# Altium PCB BMS.PcbDoc
Units mm, origin at the board's own origin, x right, y up, seen from the top; angles counter-clockwise.
Board outline 35.19 x 35.25 mm, 2 copper layers (Top Layer, Bottom Layer), stack 1.78 mm thick; 25 components, 16 nets, 75 pads, 0 vias.
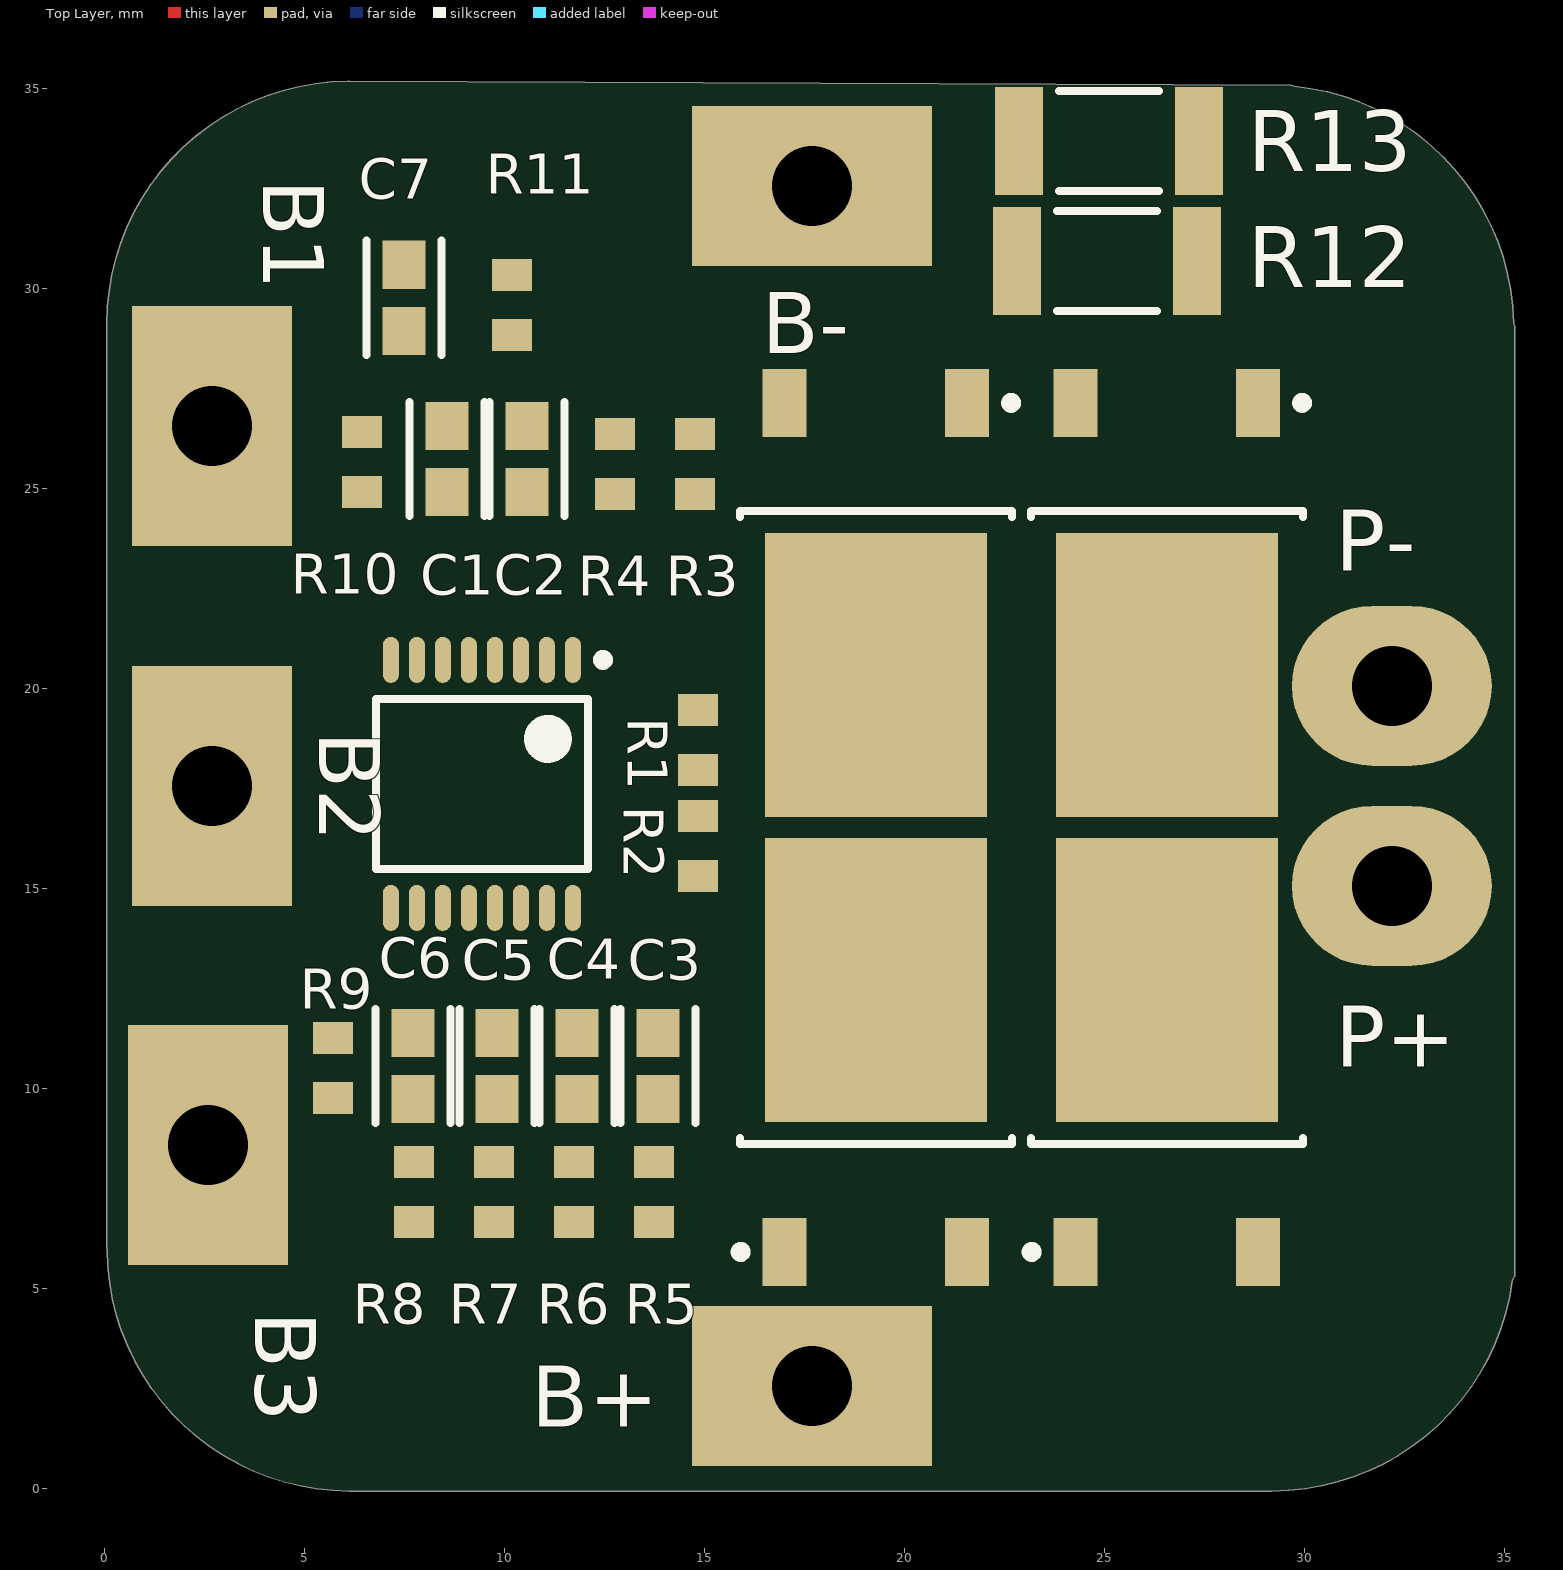
[diagram p0: Top Layer view]
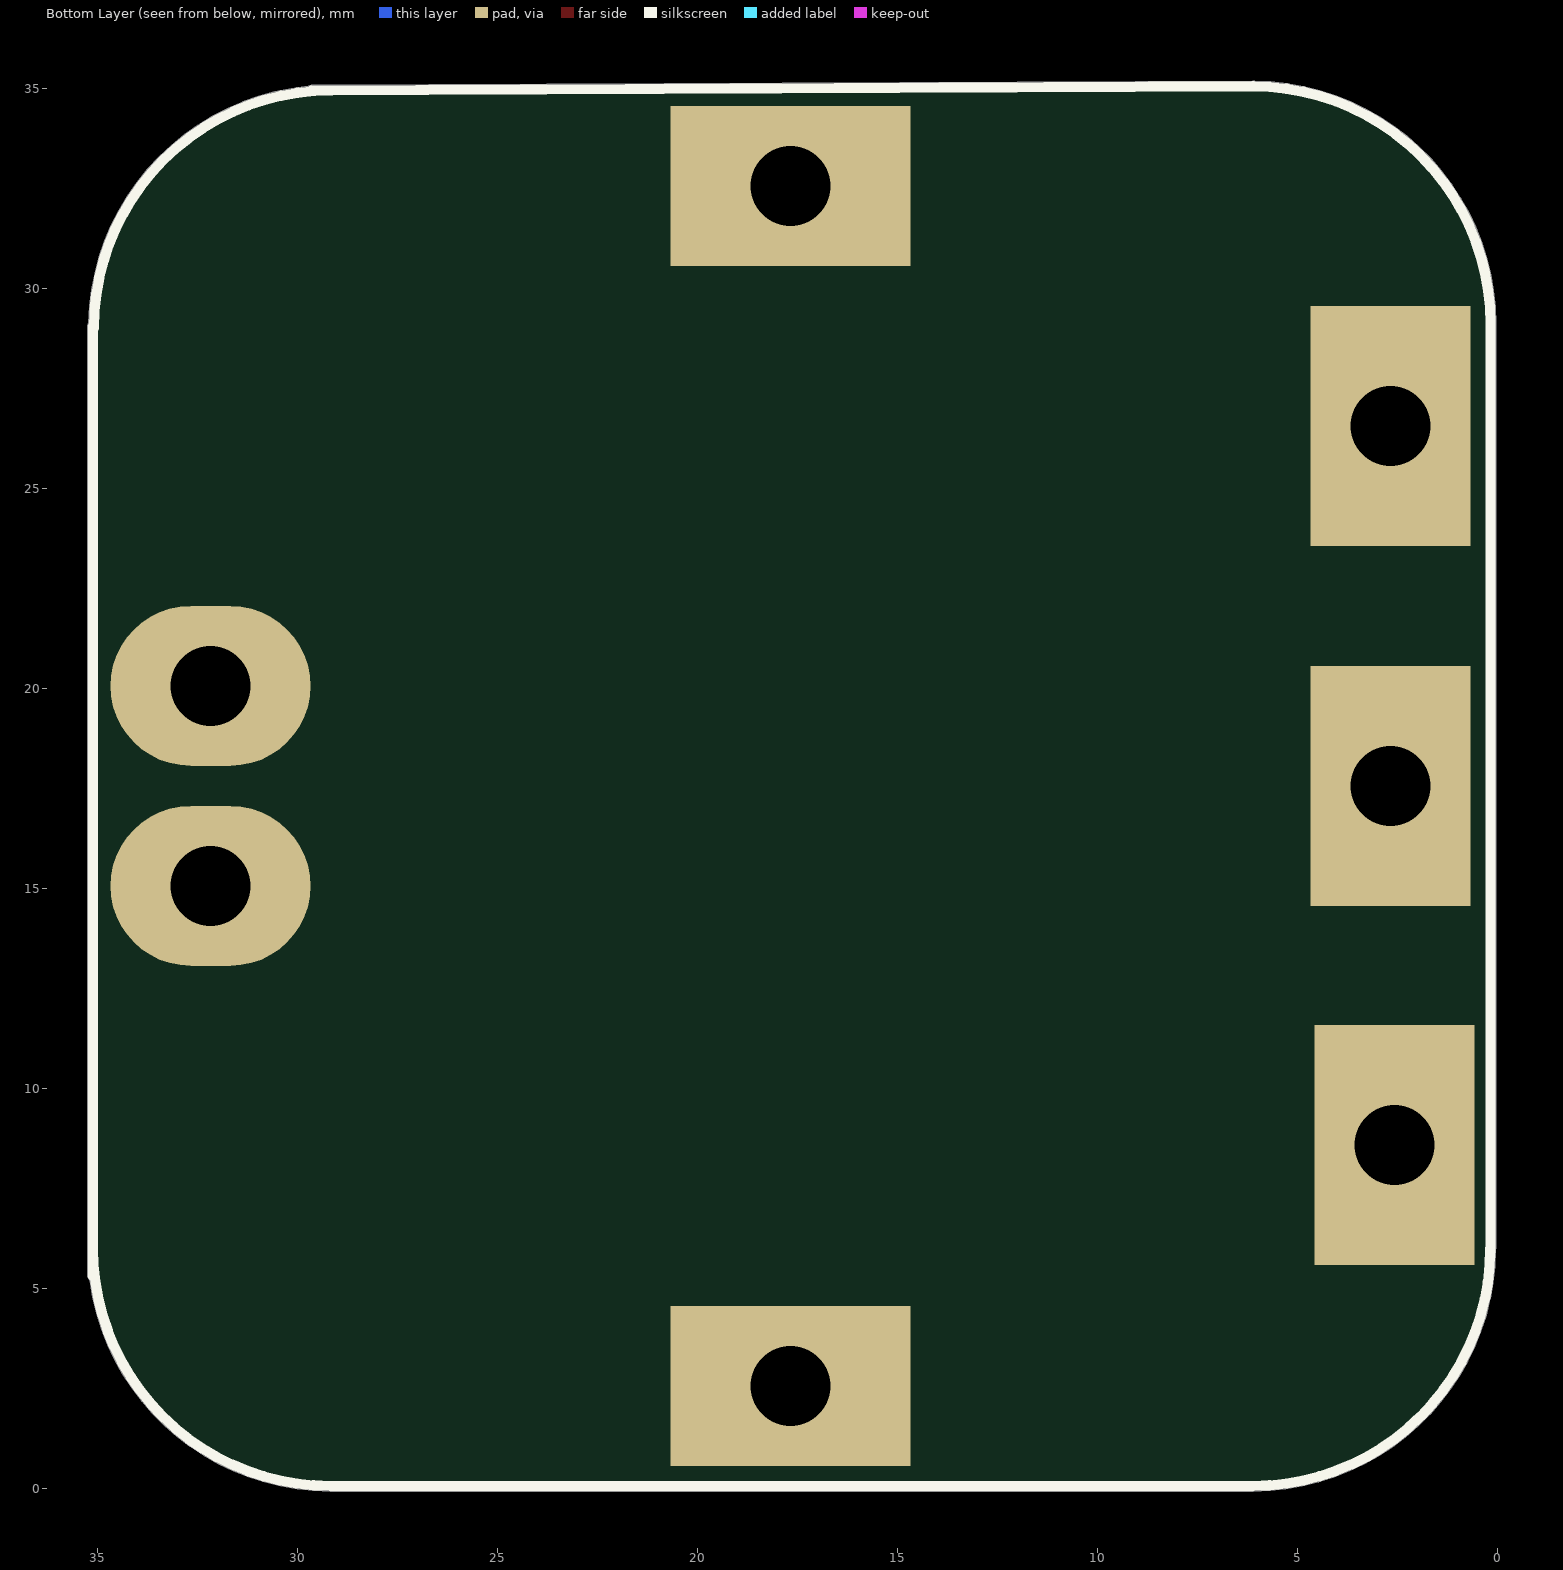
[diagram p1: Bottom Layer view, seen from below]

## Layer stack, top to bottom
Top Solder: solder mask 0.0102, Solder Resist, Dk 3.5
Top Layer: signal copper 0.0356
Dielectric 1: dielectric 1.7086, FR-4, Dk 4.8
Bottom Layer: signal copper 0.0356
Bottom Solder: solder mask 0.0102, Solder Resist, Dk 3.5

## Board outline
0.048,6.02 0.048,29.075 0.048,29.125 cw(c6.113,29.125) 6.077,35.19 6.114,35.196 29.654,35.091 29.733,35.063 cw(c29.153,29.025) 35.218,29.146 35.24,29.075 35.24,5.312 35.187,5.209 cw(c29.175,6.013) 29.175,-0.052 6.12,-0.052 6.112,-0.052 cw(c6.12,6.013)

## Design rules (kind name [scope] priority, off if disabled: settings)
Clearance [All] p1: gap=0.254 ignorepadtopadclearanceinfootprint=FALSE except(0: Arc-Hole Track-Hole SMDPad-Hole THPad-Hole Via-Hole Fill-Hole Poly-Hole Region-Hole Text-Hole)
PolygonConnect [All] p1: connectstyle=Relief reliefconductorwidth=0.254 reliefentries=4 polygonreliefangle="90 Angle" airgapwidth=0.254
RoutingVias [All] p1: holewidth=0.711 width=1.27 viastyle="Through Hole" minholewidth=0.711 minwidth=1.27 maxholewidth=0.711 maxwidth=1.27
SolderMaskExpansion [All] p1: expansion=0.102 istentingtop=FALSE
Width [All] p1: maxlimit=0.254 minlimit=0.254 preferedwidth=0.254
30 further rules are at their usual default settings.

## Components (designator, comment, footprint, x,y, rotation, side; value= is the part's Value field where it differs from the comment)
* "AOD403" AOD403 26.55,22.4 r270 top
* "AOD403" AOD403 19.275,22.4 r270 top
* "AOD403" AOD403 26.55,10.675 r90 top
* "AOD403" AOD403 19.275,10.675 r90 top
* "8254A" 8254A 9.425,17.625 r270 top
C1 "Comment" FP-0603-L_1_6_0_15-W_0_81-IPC_A 8.55,25.75 r90 top
C2 "Comment" FP-0603-L_1_6_0_15-W_0_81-IPC_A 10.55,25.75 r90 top
C3 "Comment" FP-0603-L_1_6_0_15-W_0_81-IPC_A 13.825,10.575 r90 top
C4 "Comment" FP-0603-L_1_6_0_15-W_0_81-IPC_A 11.8,10.575 r90 top
C5 "Comment" FP-0603-L_1_6_0_15-W_0_81-IPC_A 9.8,10.575 r90 top
C6 "Comment" FP-0603-L_1_6_0_15-W_0_81-IPC_A 7.7,10.575 r90 top
C7 "Comment" FP-0603-L_1_6_0_15-W_0_81-IPC_A 7.475,29.776 r90 top
R1 "Comment" RESC1608X55X25ML10T15#1 14.825,18.725 r90 top
R2 "Comment" RESC1608X55X25ML10T15#2 14.825,16.075 r90 top
R3 "Comment" RESC1608X55X25ML10T15#2 14.75,25.625 r90 top
R4 "Comment" RESC1608X55X25ML10T15#2 12.75,25.625 r90 top
R5 "Comment" RESC1608X55X25ML10T15#2 13.725,7.425 r90 top
R6 "Comment" RESC1608X55X25ML10T15#2 11.725,7.425 r90 top
R7 "Comment" RESC1608X55X25ML10T15#2 9.725,7.425 r90 top
R8 "Comment" RESC1608X55X25ML10T15#2 7.725,7.425 r90 top
R9 "Comment" RESC1608X55X25ML10T15#2 5.7,10.525 r90 top
R10 "Comment" RESC1608X55X25ML10T15#2 6.425,25.675 r90 top
R11 "Comment" RESC1608X55X25ML10T15#2 10.175,29.6 r90 top
R12 "Comment" RESC5125X89X51LL25T25 25.05,30.7 r0 top
R13 "Comment" RESC5125X89X51LL25T25 25.1,33.7 r0 top

## Footprints (in the part's own frame and the unit in brackets; to place one, negate y for a bottom-side part, rotate by r counter-clockwise, add the part's x,y. Pads: shape width x height; smd on the part's side, far side on the other; paste and mask are expansions set on the pad)
8254A [mm] "TSOP, 16-Leads, Body 5,10x4,40mm, Pitch 0,65mm, IPC Medium Density"
  oval 1.15x0.4 smd: 1(-3.1,2.275) 2(-3.1,1.625) 3(-3.1,0.975) 4(-3.1,0.325) 5(-3.1,-0.325) 6(-3.1,-0.975) 7(-3.1,-1.625) 8(-3.1,-2.275) 9(3.1,-2.275) 10(3.1,-1.625) 11(3.1,-0.975) 12(3.1,-0.325) 13(3.1,0.325) 14(3.1,0.975) 15(3.1,1.625) 16(3.1,2.275)
  silkscreen extent -3.22,-2.65 2.13,3.15, body extent -3.25,-2.65 3.25,2.65, height 1.1
AOD403 [mm] "D-PAK, 3-Pads, Body 6,21x6,74mm (max), IPC Medium Density"
  rect 1.7x1.1 smd: 1(-4.75,2.28) 3(-4.75,-2.28)
  rect 7.1x5.55 smd: 4(2.05,0)
  silkscreen extent -4.87,-3.4 -1.9,3.51, body extent -5.54,-3.3 4.49,3.3, height 2.41
FP-0603-L_1_6_0_15-W_0_81-IPC_A [mil]
  rect 47.5x42.06 smd paste+0 mask+0: 1(-32.51,0) 2(32.51,0)
  silkscreen extent -56,-37 56,37, body extent -76,-41 76,41, height 10
RESC1608X55X25ML10T15#1 [mm] "Chip Resistor, 2-Leads, Body 1.60x0.80mm, IPC Low Density"
  rect 0.8x1 smd: 2(0.75,0) R2(-0.75,0)
  body extent -0.85,-0.45 0.85,0.45, height 0.55
RESC1608X55X25ML10T15#2 [mm] "Chip Resistor, 2-Leads, Body 1.60x0.80mm, IPC Low Density"
  rect 0.8x1 smd: 1(-0.75,0) 2(0.75,0)
  body extent -0.85,-0.45 0.85,0.45, height 0.55
RESC5125X89X51LL25T25 [mm] "Chip Resistor, 2-Leads, Body 5.33x2.79mm, IPC High Density"
  rect 1.2x2.7 smd: 1(-2.25,0) 2(2.25,0)
  silkscreen extent -1.25,-1.25 1.25,1.25, body extent -2.67,-1.4 2.67,1.4, height 0.89

## Free pads (board coordinates)
  rect 6x4 hole 2: 1(17.675,2.575) 5(17.675,32.575)
  rect 4x6 hole 2: 2(2.575,8.6) 3(2.675,17.575) 4(2.675,26.575)
  oval 5x4 hole 2: 6(32.175,20.075) 7(32.175,15.075)

## Nets (pads, with @x,y where several pads share a name; then routed paths per layer and width w, separated by ;. In a path a pad name is that pad's centre, name@x,y a point inside that pad or via, vN(x,y) a via of type N, cw(c..) or ccw(c..) an arc to the next point about the centre after c; other vN are vias at no path point)
3.3: 
3.7V: 
7.4V: 
11.1V: 
BAT+: 
BAT-: 
CH+: 
CH-: 
"GND 3.3": 
LCD+: 
LI+: 
LI-: 
Net*_1: 
Net*_2: 
OUT+: 
OUT-: 
pads on no net: *.1 *.2 *.3 *.4 *.5 *.6 *.7 *.8 *.9 *.10 *.11 *.12 *.13 *.14 *.15 *.16 C1.1 C1.2 C2.1 C2.2 C3.1 C3.2 C4.1 C4.2 C5.1 C5.2 C6.1 C6.2 C7.1 C7.2 R1.2 R1.R2 R2.1 R2.2 R3.1 R3.2 R4.1 R4.2 R5.1 R5.2 R6.1 R6.2 R7.1 R7.2 R8.1 R8.2 R9.1 R9.2 R10.1 R10.2 R11.1 R11.2 R12.1 R12.2 R13.1 R13.2

## Silkscreen, mask and mechanical layers (free items; w line width, h text height)
Top Overlay:
  text "B1" at 3.954,32.746 h1.52 r270
  text "B-" at 16.423,28.389 h1.52
  text "P-" at 30.754,22.954 h1.52
  text "B2" at 5.354,18.946 h1.52 r270
  text "P+" at 30.754,10.554 h1.52
  text "B3" at 3.754,4.446 h1.52 r270
  text "B+" at 10.654,1.554 h1.52
Bottom Overlay:
  lines w0.254: 0.175,6.02 0.175,29.075 ; 0.175,29.125 cw(c6.113,29.125) 6.113,35.063 ; 0.182,6.013 ccw(c6.12,6.013) 6.12,0.075 29.175,0.075 ccw(c29.175,6.013) 35.113,6.013 ; 6.113,35.068 29.653,34.963 ; 29.153,34.963 cw(c29.153,29.025) 35.091,29.025 ; 35.112,5.312 35.112,11.389 35.112,23.543 35.112,29.075